# Altium PCB CC3200学习板底板位置图封装图.PcbDoc
Units mil, origin at the board's own origin, x right, y up, seen from the top; angles counter-clockwise.
Board outline 3346.46 x 3346.46 mil, 2 copper layers (Top Layer, Bottom Layer); 92 components, 0 nets, 406 pads, 0 vias.
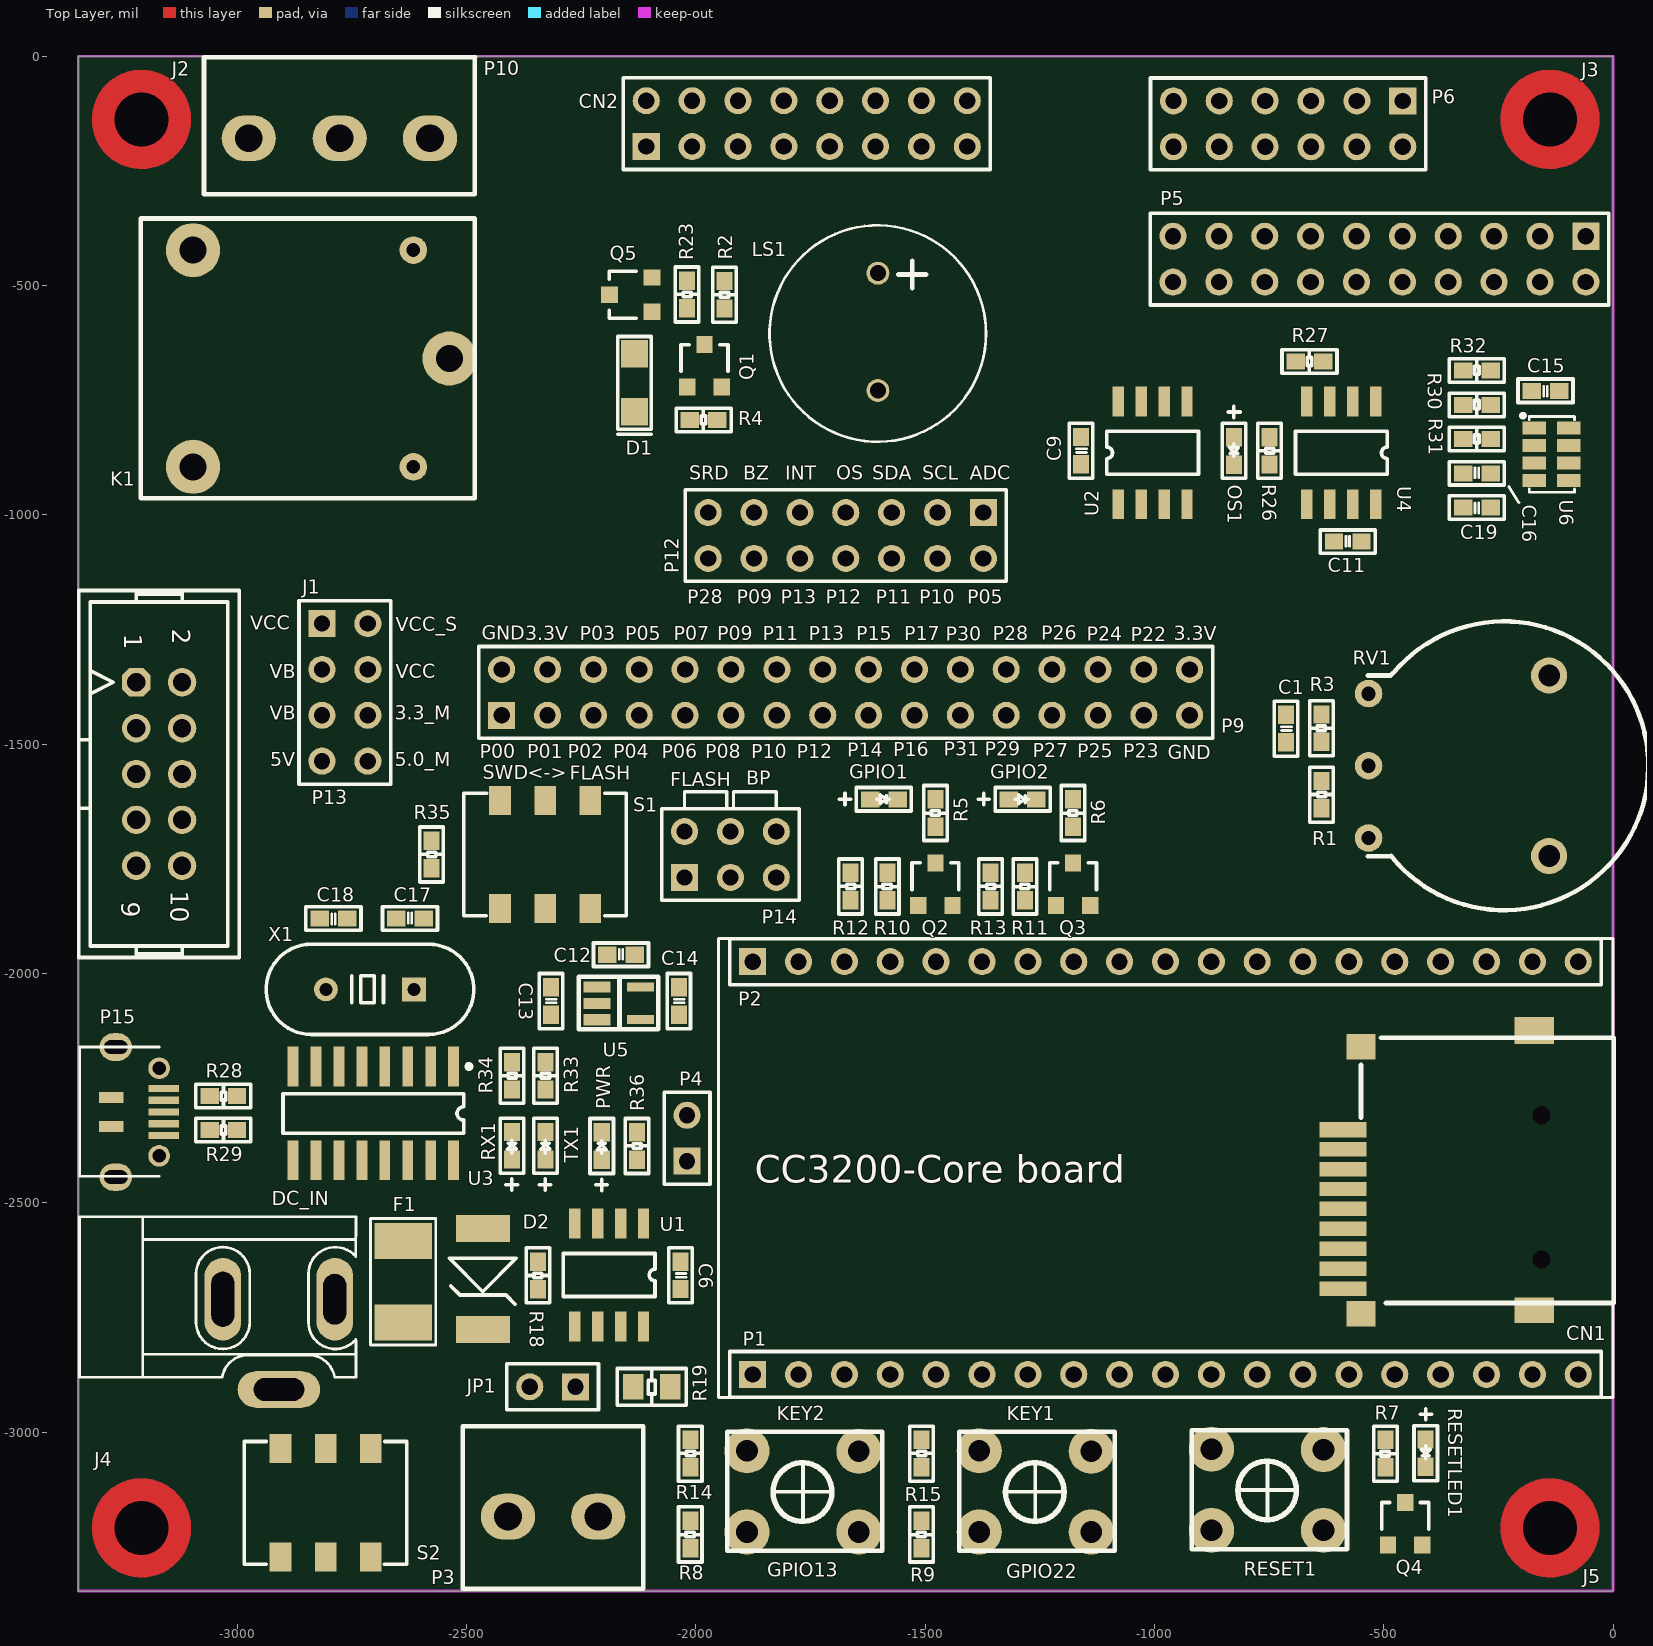
[diagram p0: Top Layer view]
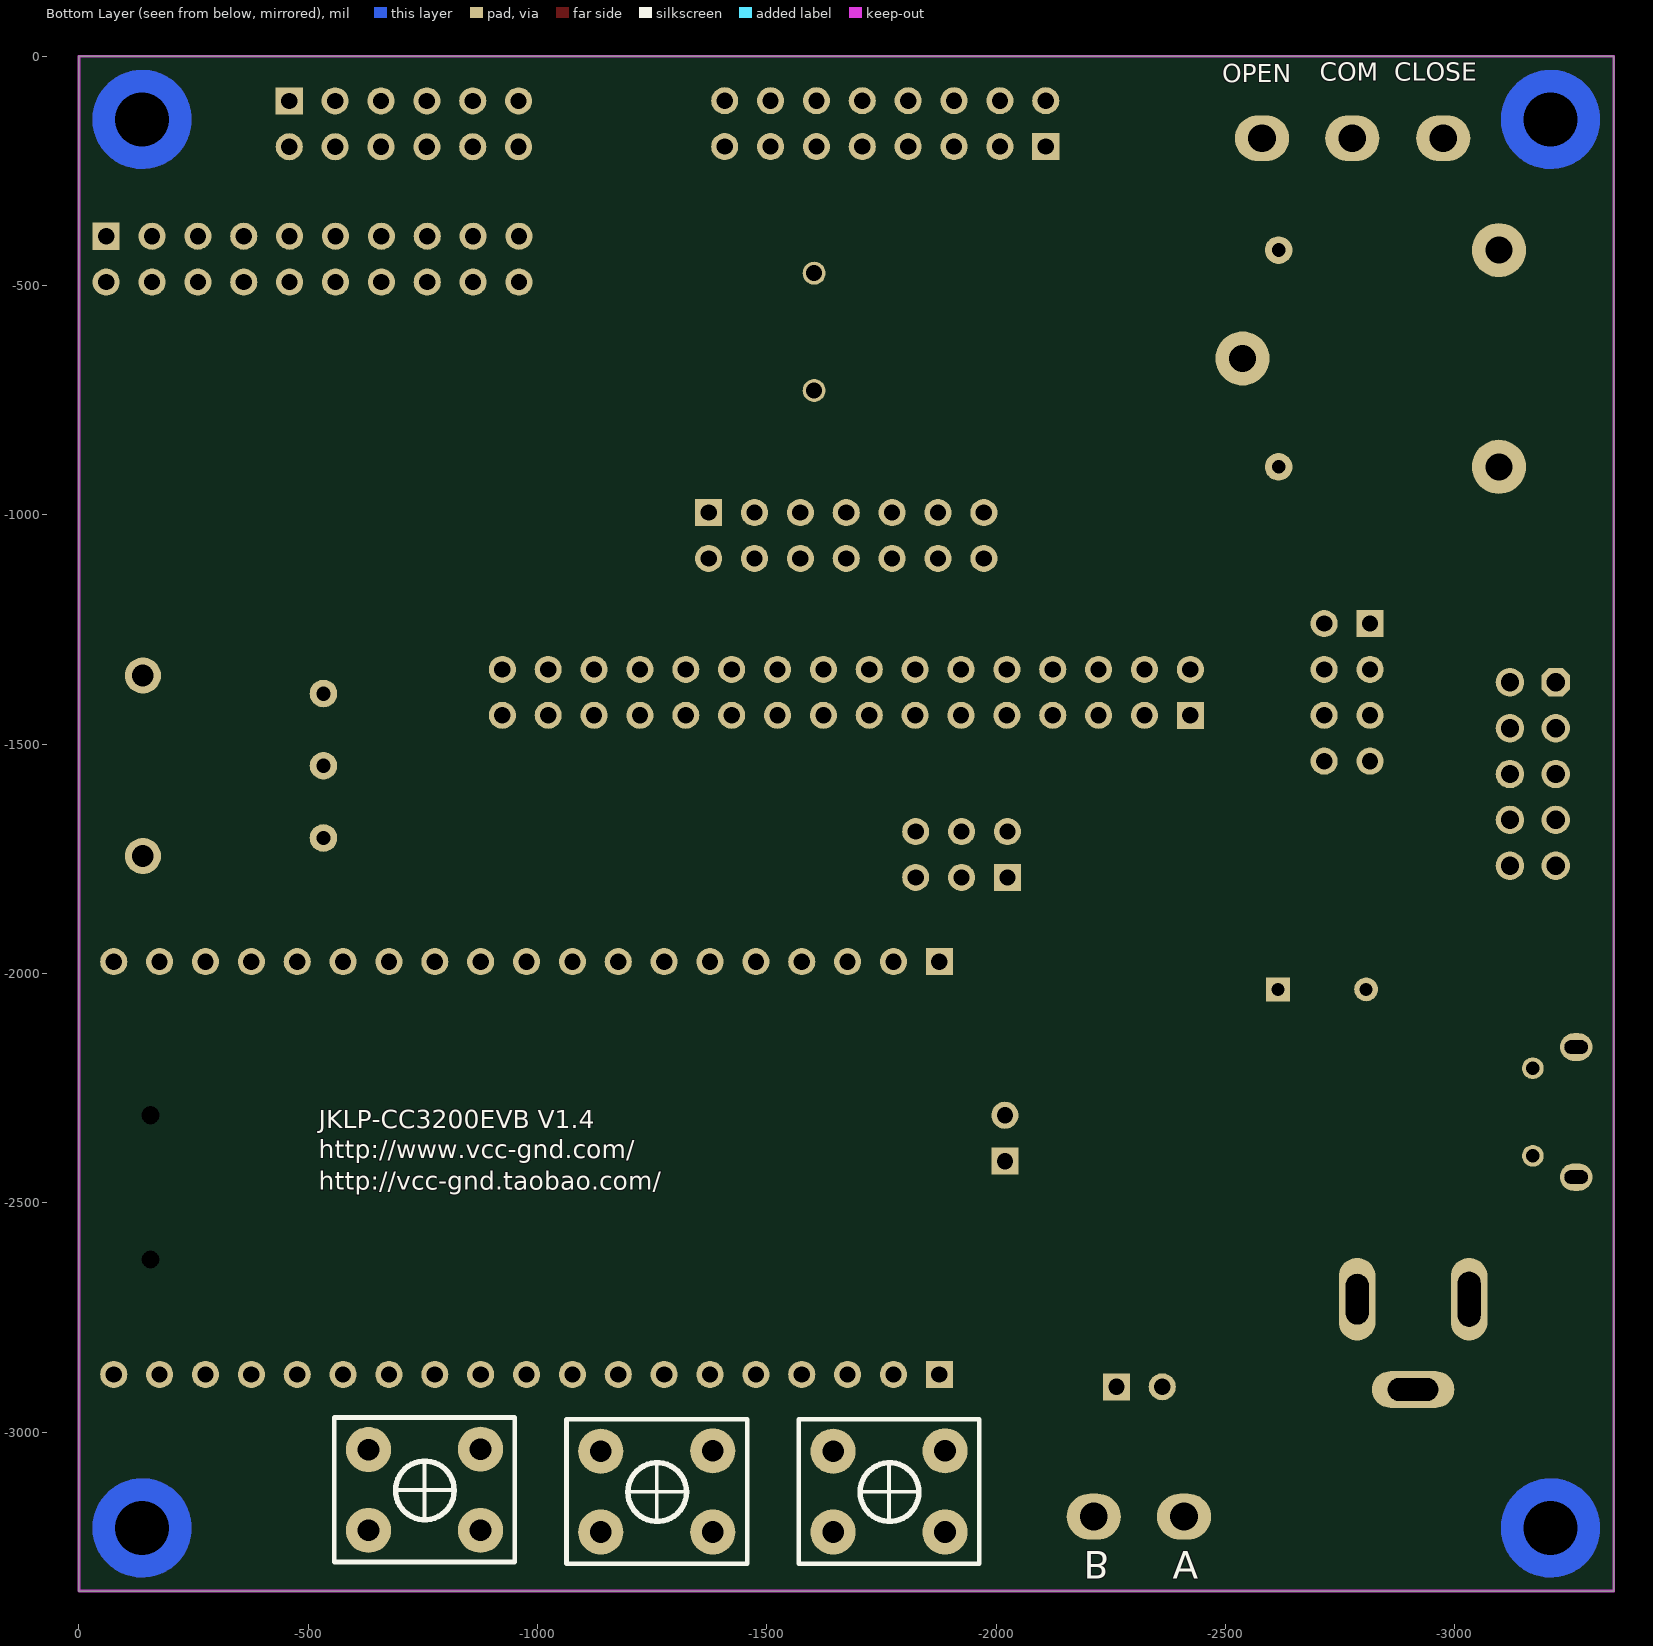
[diagram p1: Bottom Layer view, seen from below]

## Layer stack, top to bottom
Top Solder: solder mask 0.4, Solder Resist, Dk 3.5
Top Layer: signal copper 1.4
Dielectric 1: dielectric 12.6, FR-4, Dk 4.8
Bottom Layer: signal copper 1.4
Bottom Solder: solder mask 0.4, Solder Resist, Dk 3.5

## Board outline
-3050.46,0 0,0 0,-3315.46 0,-3346.46 -32.46,-3346.46 -3346.46,-3346.46 -3346.46,0

## Design rules (kind name [scope] priority, off if disabled: settings)
Clearance [All] p1: gap=7
PolygonConnect [(InPadClass('All Pads'))] p1: connectstyle=Relief reliefconductorwidth=20 reliefentries=4 polygonreliefangle="90 Angle" airgapwidth=10
PolygonConnect PolygonConnect_1 [All] p2: connectstyle=Direct reliefconductorwidth=10 reliefentries=4 polygonreliefangle="90 Angle" airgapwidth=10
RoutingVias [All] p1: holewidth=28 width=50 viastyle="Through Hole" minholewidth=28 minwidth=50 maxholewidth=28 maxwidth=50
SolderMaskExpansion [All] p1: expansion=4
Width [All] p1: maxlimit=200 minlimit=10 preferedwidth=10
29 further rules are at their usual default settings.

## Components (designator, comment, footprint, x,y, rotation, side; value= is the part's Value field where it differs from the comment)
C1 "103,0603" C0603 -713,-1466 r90 top
C6 "104,0603" C0603 -2033,-2658 r90 top
C9 "104,0603" C0603 -1160,-860 r90 top
C11 "104,0603" C0603 -578.53,-1058.46 r180 top
C12 "105,0603" C0603 -2163,-1959 r180 top
C13 "105,0603" C0603 -2316,-2060 r90 top
C14 "103,0603" C0603 -2037,-2060 r90 top
C15 "104,0603" C0603 -147.46,-729.46 r0 top
C16 "104,0603" C0603 -297,-909.36 r180 top
C17 "20p,0603" C0603 -2623,-1880 r180 top
C18 "20p,0603" C0603 -2790,-1880 r0 top
C19 "104,0603" C0603 -297,-984 r0 top
CN1 "PJS008-2000" TF -156,-2429 r180 top
CN2 "Header 8X2" HDR2X8 -2108,-197 r0 top
D1 "1N4148" D1206 -2134,-712 r270 top
D2 "SMBJ5.0A" SMBJ -2464,-2661 r270 top
DC_IN "POWER" DC10B -3206,-2880 r0 top
F1 "Fuse 2" fuse -2638,-2672 r90 top
GPIO1 "LED2" LED0603 -1589.96,-1620.09 r180 top
GPIO2 "LED2" LED0603 -1287.46,-1620.09 r180 top
J1 "Header 5X2" 10P -3170,-1565 r0 top locked
J2 "Socket" KONG -3208.66,-137.8 r0 top
J3 "Socket" KONG -137.8,-137.8 r0 top
J4 "Socket" KONG -3208.66,-3208.66 r0 top
J5 "Socket" KONG -137.8,-3208.66 r0 top
JP1 "2P,2.54mm" HDR1X2 -2262,-2901 r180 top
K1 "SRD-5V" SRD -2537,-659 r180 top
KEY1 "" key -1259.96,-3129.09 r0 top
KEY2 "" key -1766.46,-3129.09 r0 top
LS1 "Speaker" SPEAKER -1603,-601 r270 top
OS1 "LED" LED0603 -826.73,-860.46 r90 top
P1 "Header 19" HDR1X19 -1876,-2874.09 r0 top
P2 "Header 19" HDR1X19 -1876,-1974.09 r0 top
P3 "Header 2" 2P -2311,-3184 r0 top
P4 "Header 2" HDR1X2 -2019,-2409 r90 top
P5 "Header 10X2" HDR2X10 -59.46,-392.46 r180 top
P6 "Header 6X2" HDR2X6 -708.66,-147.46 r180 top
P9 "Header 16X2" HDR2X16 -2423.23,-1437.01 r0 top
P10 "Header 3" "3P - D" -2777,-179 r270 top
P12 "Header 7X2" HDR2X7 -1373,-995 r180 top
P13 "Header 4X2" HDR2X4 -2815,-1237 r270 top
P14 "Header 3X2H" HDR2X3 -2024.46,-1790.46 r0 top
P15 "USB-mrico" MicroUSB-B -3170,-2302 r270 top
PWR "LED2" LED0603 -2205,-2376 r270 top
Q1 "S8050" SOT23 -1981,-675 r0 top
Q2 "BSS138LT3G" SOT23 -1477.46,-1805.09 r0 top
Q3 "BSS138LT3G" SOT23 -1177.46,-1805.09 r0 top
Q4 "BSS138LT3G" SOT23 -453.46,-3199.46 r0 top
Q5 "S8050" SOT23 -2142,-520 r90 top
R1 "15K,0603" R0603 -636,-1610 r90 top
R2 "100,0603" R0603 -1937,-520 r270 top
R3 "1K,0603" R0603 -636,-1465 r270 top
R4 "10k,0603" R0603 -1983,-793 r180 top
R5 "270,0603" R0603 -1477.46,-1650.09 r270 top
R6 "270,0603" R0603 -1177.46,-1650.09 r270 top
R7 "270,0603" R0603 -496.58,-3046.68 r270 top
R8 "1k,0603" R0603 -2011.97,-3223 r270 top
R9 "1k,0603" R0603 -1508,-3223 r270 top
R10 "10k,0603" R0603 -1582.46,-1810.24 r270 top
R11 "10k,0603" R0603 -1282.46,-1810.24 r270 top
R12 "100k,0603" R0603 -1662.46,-1810.09 r90 top
R13 "100k,0603" R0603 -1357.46,-1810.09 r90 top
R14 "10k,0603" R0603 -2011.97,-3046.54 r90 top
R15 "10k,0603" R0603 -1508,-3046.54 r90 top
R18 "10k,0603" R0603 -2344,-2658.07 r270 top
R19 "120R,0603" R0805 -2096,-2901 r0 top
R23 "10k,0603" R0603 -2019.46,-519.46 r90 top
R26 "680R,0603" R0603 -749.46,-860.39 r90 top
R27 "10k,0603" R0603 -662,-666 r180 top
R28 "22,0603" R0603 -3030.08,-2267 r0 top
R29 "22,0603" R0603 -3030.08,-2340.73 r0 top
R30 "3.3k,0603" R0603 -297.07,-760.09 r180 top
R31 "3.3k,0603" R0603 -297.07,-834.73 r180 top
R32 "3.3k,0603" R0603 -297.07,-685.46 r180 top
R33 "680R,0603" R0603 -2328,-2223 r90 top
R34 "680R,0603" R0603 -2401,-2223 r90 top
R35 "270,0603" R0603 -2576,-1740.39 r90 top
R36 "680R,0603" R0603 -2128,-2375.93 r90 top
RESET1 "" key -753.46,-3125.46 r0 top
RESETLED1 "LED2" LED0603 -408.58,-3045.68 r90 top
RV1 "10K,RV09" B503 -238,-1547 r270 top
RX1 "LED" LED0603 -2401,-2375.46 r270 top
S1 "SWITCH" switch1 -2328.46,-1740.46 r0 top
S2 "SWITCH" switch1 -2807,-3154 r180 top
TX1 "LED" LED0603 -2328,-2375.46 r270 top
U1 "SP3485" SOP-8 -2114,-2545 r270 top
U2 "AT24C08" SOP-8 -1079,-977 r90 top
U3 "CH340G" SOP16M -2703,-2305 r180 top
U4 "LM75A" SOP-8 -517.46,-752.59 r270 top
U5 "RT9193" SOT-23-5 -2168,-2065 r270 top
U6 "AP3216C" QFN8 -104.46,-810.46 r270 top
X1 "12MHz,49s" XL -2710.46,-2034.46 r180 top

## Footprints (in the part's own frame and the unit in brackets; to place one, negate y for a bottom-side part, rotate by r counter-clockwise, add the part's x,y. Pads: shape width x height; smd on the part's side, far side on the other; paste and mask are expansions set on the pad)
2P [mm]
  oval 3x2.54 hole 1.54: 1(-2.5,0) 2(2.5,0)
  silkscreen extent -5,-4 5,5
"3P - D" [mm]
  oval 2.54x3 hole 1.54: 1(0,5.017) 2(0,0.017) 3(0,-5.016)
  silkscreen extent -4.5,-7.5 3.1,7.52
10P [mil]
  oct 62x62 hole 40: 1(-50,200)
  round 62 hole 40: 2(50,200) 3(-50,100) 4(50,100) 5(-50,0) 6(50,0) 7(-50,-100) 8(50,-100) 9(-50,-200) 10(50,-200)
  silkscreen extent -175,-400 175,400
B503 [mm]
  round 2 hole 1.2: 0(-5,2.5) 0(5,2.5)
  round 1.524 hole 0.8: 1(-4,-7.5) 2(0,-7.5) 3(4,-7.5)
  silkscreen extent -8,-7.53 8,8
C0603 [mil]
  rect 40x35 smd: 1(-29.92,0) 2(29.92,0)
  silkscreen extent -60,-26 60,26
D1206 [mm]
  rect 1.524x1.5 smd: 1(-1.6,0) 2(1.6,0)
  silkscreen extent -2.57,-0.91 2.84,0.94
DC10B [mil]
  oval 80x180 hole 50 slot 110 at 90 deg: 1(419.09,170)
  oval 80x180 hole 50 slot 120 at 90 deg: 2(175,170)
  oval 180x80 hole 50 slot 110 at 0 deg: 3(297.05,-26.85)
  silkscreen extent -138,0 465,350
fuse [mm]
  rect 2x3.2 smd: 1(-2.25,0) 2(2.25,0)
  silkscreen extent -3.5,-1.8 3.5,1.8
HDR1X2 [mm] "Connector; Header; 2 Position"
  rect 1.5x1.5 hole 0.9: 1(0,0)
  round 1.5 hole 0.9: 2(2.54,0)
  silkscreen extent -1.27,-1.27 3.81,1.27
HDR1X19 [mm] "Connector; Header; 19 Position"
  rect 1.5x1.5 hole 0.9: 1(0,0)
  round 1.5 hole 0.9: 2(2.54,0) 3(5.08,0) 4(7.62,0) 5(10.16,0) 6(12.7,0) 7(15.24,0) 8(17.78,0) 9(20.32,0) 10(22.86,0) 11(25.4,0) 12(27.94,0) 13(30.48,0) 14(33.02,0) 15(35.56,0) 16(38.1,0) 17(40.64,0) 18(43.18,0) 19(45.72,0)
  silkscreen extent -1.27,-1.27 46.99,1.27
HDR2X3 [mm] "Connector; Header; 3x2 Position"
  rect 1.5x1.5 hole 0.9: 1(0,0)
  round 1.5 hole 0.9: 2(0,2.54) 3(2.54,0) 4(2.54,2.54) 5(5.08,0) 6(5.08,2.54)
  silkscreen extent -1.27,-1.27 6.35,3.81
HDR2X4 [mm] "Connector; Header; 4x2 Position"
  rect 1.5x1.5 hole 0.9: 1(0,0)
  round 1.5 hole 0.9: 2(0,2.54) 3(2.54,0) 4(2.54,2.54) 5(5.08,0) 6(5.08,2.54) 7(7.62,0) 8(7.62,2.54)
  silkscreen extent -1.27,-1.27 8.89,3.81
HDR2X6 [mm] "Connector; Header; 6x2 Position"
  rect 1.5x1.5 hole 0.9: 1(-6.35,-1.27)
  round 1.5 hole 0.9: 2(-6.35,1.27) 3(-3.81,-1.27) 4(-3.81,1.27) 5(-1.27,-1.27) 6(-1.27,1.27) 7(1.27,-1.27) 8(1.27,1.27) 9(3.81,-1.27) 10(3.81,1.27) 11(6.35,-1.27) 12(6.35,1.27)
  silkscreen extent -7.62,-2.54 7.62,2.54
HDR2X7 [mm] "Connector; Header; 7x2 Position"
  rect 1.5x1.5 hole 0.9: 1(0,0)
  round 1.5 hole 0.9: 2(0,2.54) 3(2.54,0) 4(2.54,2.54) 5(5.08,0) 6(5.08,2.54) 7(7.62,0) 8(7.62,2.54) 9(10.16,0) 10(10.16,2.54) 11(12.7,0) 12(12.7,2.54) 13(15.24,0) 14(15.24,2.54)
  silkscreen extent -1.27,-1.27 16.51,3.81
HDR2X8 [mm] "Connector; Header; 8x2 Position"
  rect 1.5x1.5 hole 0.9: 1(0,0)
  round 1.5 hole 0.9: 2(0,2.54) 3(2.54,0) 4(2.54,2.54) 5(5.08,0) 6(5.08,2.54) 7(7.62,0) 8(7.62,2.54) 9(10.16,0) 10(10.16,2.54) 11(12.7,0) 12(12.7,2.54) 13(15.24,0) 14(15.24,2.54) 15(17.78,0) 16(17.78,2.54)
  silkscreen extent -1.27,-1.27 19.05,3.81
HDR2X10 [mm] "Connector; Header; 10x2 Position"
  rect 1.5x1.5 hole 0.9: 1(0,0)
  round 1.5 hole 0.9: 2(0,2.54) 3(2.54,0) 4(2.54,2.54) 5(5.08,0) 6(5.08,2.54) 7(7.62,0) 8(7.62,2.54) 9(10.16,0) 10(10.16,2.54) 11(12.7,0) 12(12.7,2.54) 13(15.24,0) 14(15.24,2.54) 15(17.78,0) 16(17.78,2.54) 17(20.32,0) 18(20.32,2.54) 19(22.86,0) 20(22.86,2.54)
  silkscreen extent -1.27,-1.27 24.13,3.81
HDR2X16 [mm] "Connector; Header; 16x2 Position"
  rect 1.5x1.5 hole 0.9: 1(0,0)
  round 1.5 hole 0.9: 2(0,2.54) 3(2.54,0) 4(2.54,2.54) 5(5.08,0) 6(5.08,2.54) 7(7.62,0) 8(7.62,2.54) 9(10.16,0) 10(10.16,2.54) 11(12.7,0) 12(12.7,2.54) 13(15.24,0) 14(15.24,2.54) 15(17.78,0) 16(17.78,2.54) 17(20.32,0) 18(20.32,2.54) 19(22.86,0) 20(22.86,2.54) 21(25.4,0) 22(25.4,2.54) 23(27.94,0) 24(27.94,2.54) 25(30.48,0) 26(30.48,2.54) 27(33.02,0) 28(33.02,2.54) 29(35.56,0) 30(35.56,2.54) 31(38.1,0) 32(38.1,2.54)
  silkscreen extent -1.27,-1.27 39.37,3.81
key [mm]
  round 2.5 hole 1.2: 1(-3.1,-2.248) 1(3.1,-2.248) 2(-3.1,2.248) 2(3.1,2.222)
  silkscreen extent -4.2,-3.3 4.4,3.3
KONG [mm]
  round 0 hole 3 mask+3: 1(0,0)
  Top Layer circle w1.5: c0,0 r2
  Bottom Layer circle w1.5: c0,0 r2
LED0603 [mil]
  rect 40x35 smd: 1(29.92,0) 2(-29.92,0)
  silkscreen extent -60,-26 97,26
MicroUSB-B [mm]
  oval 1.54x1.8 hole 0.762 slot 1.3 at 90 deg: 0(-3.6,-2.4)
  round 1.2 hole 0.762: 0(-2.425,0) 0(2.425,0)
  rect 0.6x1.35 smd: 0(-0.8,-2.65) 0(0.8,-2.65)
  oval 1.524x1.8 hole 0.762 slot 1.3 at 90 deg: 0(3.6,-2.4)
  rect 0.4x1.7 smd: 1(1.3,0.25) 2(0.65,0.25) 3(0,0.25) 4(-0.65,0.25) 5(-1.3,0.25)
  silkscreen extent -3.6,-4.4 3.56,0
QFN8 [mm]
  rect 0.7x1.3 smd: 1(0,-1.703) 2(0.97,-1.703) 3(1.94,-1.703) 4(2.91,-1.703) 5(2.91,0.203) 6(1.94,0.203) 7(0.97,0.203) 8(0,0.203)
  silkscreen extent -0.78,-2.44 3.56,0.51
R0603 [mil]
  rect 40x35 smd: 1(-29.92,0) 2(29.92,0)
  silkscreen extent -60,-26 60,26
R0805 [mil]
  rect 45x55 smd: 1(-40,0) 2(40,0)
  silkscreen extent -75,-40 75,40
SMBJ [mm]
  rect 1.5x3 smd: 1(-2.667,0) 2(2.921,0)
  silkscreen extent -1.02,-1.85 1.52,1.83
SOP16M [mm]
  rect 0.6x2.2 smd: 1(-4.445,-2.6) 2(-3.175,-2.6) 3(-1.905,-2.6) 4(-0.635,-2.6) 5(0.635,-2.6) 6(1.905,-2.6) 7(3.175,-2.6) 8(4.445,-2.6) 9(4.445,2.6) 10(3.175,2.6) 11(1.905,2.6) 12(0.635,2.6) 13(-0.635,2.6) 14(-1.905,2.6) 15(-3.175,2.6) 16(-4.445,2.6)
  silkscreen extent -5.42,-2.72 5,1.1
SOP-8 [mil]
  rect 65x25 smd: 1(0,0) 2(0,-50) 3(0,-100) 4(0,-150) 5(224.41,-150) 6(224.41,-100) 7(224.41,-50) 8(224.41,0)
  silkscreen extent 65,-175 159,25
SOT23 [mm]
  rect 0.9x0.95 smd: 1(0,1.175) 2(-0.95,-1.175) 3(0.95,-1.175)
  silkscreen extent -1.3,-0.3 1.3,1.18
SOT-23-5 [mm]
  rect 0.6x1.5 smd: 1(-0.9,-1.2) 2(0,-1.2)
  rect 0.63x1.5 smd: 3(0.9,-1.2)
  rect 0.5x1.5 smd: 4(0.9,1.2) 5(-0.9,1.2)
  silkscreen extent -1.47,-2.21 1.43,2.18
SPEAKER [mil]
  round 50 hole 35: 1(-127.92,0) 2(127.92,0)
  silkscreen extent -232,-236 240,236
SRD [mm]
  round 3 hole 1.5: 1(0,0) 2(14.2,6) 3(14.2,-6)
  round 1.524 hole 0.762: 4(2,6) 5(2,-6)
  silkscreen extent -1.4,-7.75 17.1,7.75
switch1 [mm]
  rect 1.2x1.6 smd: 1(-2.5,-3) 2(0,-3) 3(2.5,-3) 4(2.5,3) 5(0,3) 6(-2.5,3)
  silkscreen extent -4.5,-3.4 4.5,3.4
TF [mm]
  rect 2.6x0.85 smd: 1(11,-2.25)
  rect 2.6x0.8 smd: 2(11,-1.172) 3(11,-0.069) 4(11,1.034) 5(11,2.137) 6(11,3.241) 7(11,4.344) 8(11,5.447) 9(11,6.55)
  round 0 hole 1: 11(0,-3.05) 12(0,4.95)
  rect 1.6x1.4 smd: G1(10,7.95) G4(10,-6.85)
  rect 2.2x1.5 smd: G2(0.4,-7.75)
  rect 2.2x1.4 smd: G3(0.4,7.75)
  silkscreen extent -4,-7.35 10,7.35
XL [mil]
  rect 52x52 hole 28: 1(-96.06,0)
  round 52 hole 28: 2(96.06,0)
  silkscreen extent -226,-98 226,98

## Part data
C1 C9 C12 C13 C14: library part Cap, "Capacitor"
C6 C11 C15 C16 C17 C18 C19: library part CAP, "Capacitor"
CN1: library part SMS016AFA5E
CN2: "Header, 8-Pin, Dual row"
D1: library part "Diode 1N4148", "High Conductance Fast Diode"
D2: library part SMBJ, "TVS"
DC_IN: library part POW
F1: "Fuse"
GPIO1 GPIO2 PWR RESETLED1: "Typical RED, GREEN, YELLOW, AMBER GaAs LED"
J1: "Header, 5-Pin, Dual row"
JP1: library part JP2
K1: library part Relay-SPDT, "Single-Pole Dual-Throw Relay"
KEY1 KEY2 RESET1: library part SW-PB_V, "SWITCH"
LS1: "Loudspeaker"
P1 P2: "Header, 19-Pin"
P3 P4: "Header, 2-Pin"
P5: "Header, 10-Pin, Dual row"
P6: "Header, 6-Pin, Dual row"
P9: "Header, 16-Pin, Dual row"
P10: "Header, 3-Pin"
P12: "Header, 7-Pin, Dual row"
P13: "Header, 4-Pin, Dual row"
P14: "Header, 3-Pin, Dual row, Right Angle"
P15: library part usb-STM
Q1 Q5: library part NPN, "NPN Bipolar Transistor"
Q2 Q3 Q4: library part MOS
R1 R2 R3 R4 R5 R6 R7 R8 R9 R10 R11 R12 R13 R14 R15 R18 R19 R23 R26 R27 R28 R29 R30 R31 R32 R33 R34 R35 R36: library part Res1, "Resistor"
RV1: library part RV
S1 S2: library part switch1
U1: library part SP3458
U2: library part ST24C08RB5, "Serial 8K (1K x 8) EEPROM"
U3: "USB to TTL Serial / UART"
U5: library part RT9193X_5P
U6: "ALS+PS Sensor"
X1: library part CRYSTAL, "Crystal"

## Nets (pads, with @x,y where several pads share a name; then routed paths per layer and width w, separated by ;. In a path a pad name is that pad's centre, name@x,y a point inside that pad or via, vN(x,y) a via of type N, cw(c..) or ccw(c..) an arc to the next point about the centre after c; other vN are vias at no path point)
pads on no net: C1.1 C1.2 C6.1 C6.2 C9.1 C9.2 C11.1 C11.2 C12.1 C12.2 C13.1 C13.2 C14.1 C14.2 C15.1 C15.2 C16.1 C16.2 C17.1 C17.2 C18.1 C18.2 C19.1 C19.2 CN1.1 CN1.2 CN1.3 CN1.4 CN1.5 CN1.6 CN1.7 CN1.8 CN1.9 CN1.11 CN1.12 CN1.G1 CN1.G2 CN1.G3 CN1.G4 CN2.1 CN2.2 CN2.3 CN2.4 CN2.5 CN2.6 CN2.7 CN2.8 CN2.9 CN2.10 CN2.11 CN2.12 CN2.13 CN2.14 CN2.15 CN2.16 D1.1 D1.2 D2.1 D2.2 DC_IN.1 DC_IN.2 DC_IN.3 F1.1 F1.2 GPIO1.1 GPIO1.2 GPIO2.1 GPIO2.2 J1.1 J1.2 J1.3 J1.4 J1.5 J1.6 J1.7 J1.8 J1.9 J1.10 J2.1 J3.1 J4.1 J5.1 JP1.1 JP1.2 K1.1 K1.2 K1.3 K1.4 K1.5 KEY1.1 KEY1.2 KEY2.1 KEY2.2 LS1.1 LS1.2 OS1.1 OS1.2 P1.1 P1.2 P1.3 P1.4 P1.5 P1.6 P1.7 P1.8 P1.9 P1.10 P1.11 P1.12 P1.13 P1.14 P1.15 P1.16 P1.17 P1.18 P1.19 P2.1 P2.2 P2.3 P2.4 P2.5 P2.6 P2.7 P2.8 P2.9 P2.10 P2.11 P2.12 P2.13 P2.14 P2.15 P2.16 P2.17 P2.18 P2.19 P3.1 P3.2 P4.1 P4.2 P5.1 P5.2 P5.3 P5.4 P5.5 P5.6 P5.7 P5.8 P5.9 P5.10 P5.11 P5.12 P5.13 P5.14 P5.15 P5.16 P5.17 P5.18 P5.19 P5.20 P6.1 P6.2 P6.3 P6.4 P6.5 P6.6 P6.7 P6.8 P6.9 P6.10 P6.11 P6.12 P9.1 P9.2 P9.3 P9.4 P9.5 P9.6 P9.7 P9.8 P9.9 P9.10 P9.11 P9.12 P9.13 P9.14 P9.15 P9.16 P9.17 P9.18 P9.19 P9.20 P9.21 P9.22 P9.23 P9.24 P9.25 P9.26 P9.27 P9.28 P9.29 P9.30 P9.31 P9.32 P10.1 P10.2 P10.3 P12.1 P12.2 P12.3 P12.4 P12.5 P12.6 P12.7 P12.8 P12.9 P12.10 P12.11 P12.12 P12.13 P12.14 P13.1 P13.2 P13.3 P13.4 P13.5 P13.6 P13.7 P13.8 P14.1 P14.2 P14.3 P14.4 P14.5 P14.6 P15.0 P15.1 P15.2 P15.3 P15.4 P15.5 PWR.1 PWR.2 Q1.1 Q1.2 Q1.3 Q2.1 Q2.2 Q2.3 Q3.1 Q3.2 Q3.3 Q4.1 Q4.2 Q4.3 Q5.1 Q5.2 Q5.3 R1.1 R1.2 R2.1 R2.2 R3.1 R3.2 R4.1 R4.2 R5.1 R5.2 R6.1 R6.2 R7.1 R7.2 R8.1 R8.2 R9.1 R9.2 R10.1 R10.2 R11.1 R11.2 R12.1 R12.2 R13.1 R13.2 R14.1 R14.2 R15.1 R15.2 R18.1 R18.2 R19.1 R19.2 R23.1 R23.2 R26.1 R26.2 R27.1 R27.2 R28.1 R28.2 R29.1 R29.2 R30.1 R30.2 R31.1 R31.2 R32.1 R32.2 R33.1 R33.2 R34.1 R34.2 R35.1 R35.2 R36.1 R36.2 RESET1.1 RESET1.2 RESETLED1.1 RESETLED1.2 RV1.0 RV1.1 RV1.2 RV1.3 RX1.1 RX1.2 S1.1 S1.2 S1.3 S1.4 S1.5 S1.6 S2.1 S2.2 S2.3 S2.4 S2.5 S2.6 TX1.1 TX1.2 U1.1 U1.2 U1.3 U1.4 U1.5 U1.6 U1.7 U1.8 U2.1 U2.2 U2.3 U2.4 U2.5 U2.6 U2.7 U2.8 U3.1 U3.2 U3.3 U3.4 U3.5 U3.6 U3.7 U3.8 U3.9 U3.10 U3.11 U3.12 U3.13 U3.14 U3.15 U3.16 U4.1 U4.2 U4.3 U4.4 U4.5 U4.6 U4.7 U4.8 U5.1 U5.2 U5.3 U5.4 U5.5 U6.1 U6.2 U6.3 U6.4 U6.5 U6.6 U6.7 U6.8 X1.1 X1.2

## Keep-outs
Keep-Out Layer:
  lines w6: -0.46,0 -3346.46,0 -3346.46,-3346.46 0,-3346.46 0,-1261.46
  lines w6.5: 0,-1314.46 0,-0.46

## Silkscreen, mask and mechanical layers (free items; w line width, h text height)
Top Overlay:
  lines w6.5: -227.46,-938.46 -205.46,-973.46 ; -1950,-2924.09 -1950,-1924.09 0,-1924.09 0,-2924.09 -1950,-2924.09
  lines w7: -2024.46,-1640.46 -2024.46,-1603.46 -1932.46,-1603.46 -1932.46,-1638.46 ; -1917.46,-1640.46 -1917.46,-1604.46 ; -1917.46,-1603.46 -1824.46,-1603.46 ; -1824.46,-1639.46 -1824.46,-1604.46
  text "SRD" at -2014.46,-923.46 h30
  text "BZ" at -1896,-923.46 h30
  text "INT" at -1805,-923.46 h30
  text "OS" at -1694,-923 h30
  text "SDA" at -1615,-923.46 h30
  text "SCL" at -1506,-923.46 h30
  text "ADC" at -1403,-923.46 h30
  text "P28" at -2018.46,-1194 h30
  text "P09" at -1911,-1194 h30
  text "P13" at -1814.46,-1194 h30
  text "P12" at -1717,-1194 h30
  text "P11" at -1608,-1194 h30
  text "P10" at -1513,-1194 h30
  text "P05" at -1408,-1194 h30
  text "VCC" at -2971.88,-1250 h30
  text "VCC_S" at -2654.46,-1254 h30
  text "GND" at -2466.46,-1272.46 h30
  text "P26" at -1246.46,-1272.46 h30
  text "3.3V" at -2371.46,-1273.46 h30
  text "P03" at -2253.46,-1273.1 h30
  text "P05" at -2153.46,-1273.1 h30
  text "P07" at -2048.46,-1273.1 h30
  text "P09" at -1953.46,-1273.1 h30
  text "P11" at -1853.46,-1273.1 h30
  text "P13" at -1753.46,-1273.1 h30
  text "P15" at -1650.46,-1273.46 h30
  text "P17" at -1545.46,-1273.46 h30
  text "P28" at -1352.46,-1273.46 h30
  text "3.3V" at -958.46,-1273.1 h30
  text "P30" at -1455.46,-1274.46 h30
  text "P24" at -1147.46,-1274.46 h30
  text "P22" at -1051.46,-1275.46 h30
  text "VB" at -2929,-1356 h30
  text "VCC" at -2654.46,-1356 h30
  text "VB" at -2929,-1447 h30
  text "3.3_M" at -2656.46,-1447 h30
  text "P31" at -1459.46,-1525.46 h30
  text "P29" at -1370.46,-1525.46 h30
  text "P16" at -1569.46,-1526.46 h30
  text "P14" at -1669.46,-1527.46 h30
  text "P27" at -1265.46,-1528.46 h30
  text "P25" at -1168.46,-1529.46 h30
  text "P23" at -1068.46,-1529.46 h30
  text "P00" at -2470.46,-1530.46 h30
  text "P01" at -2367.46,-1530.46 h30
  text "P02" at -2279.46,-1531.09 h30
  text "P04" at -2179.46,-1531.09 h30
  text "P06" at -2074.46,-1531.09 h30
  text "P08" at -1979.46,-1531.09 h30
  text "P10" at -1879.46,-1531.09 h30
  text "P12" at -1779.46,-1531.09 h30
  text "GND" at -970.46,-1532.46 h30
  text "5V" at -2928,-1548 h30
  text "5.0_M" at -2656,-1548 h30
  text "SWD" at -2465,-1576 h30
  text "<->" at -2366,-1576 h30
  text "FLASH" at -2275,-1577 h30
  text "BP" at -1889.46,-1588.46 h30
  text "FLASH" at -2055.46,-1591.46 h30
  text "CC3200-Core board" at -1871,-2456 h60
  text "GPIO13" at -1844.46,-3315.46 h30
  text "GPIO22" at -1323.46,-3318.46 h30
Bottom Overlay:
  text "CLOSE" at -2868,-54 h40
  text "COM" at -2705,-54 h40
  text "OPEN" at -2493,-57 h40
  text "JKLP-CC3200EVB V1.4" at -522.46,-2337.46 h40
  text "http://www.vcc-gnd.com/" at -522.46,-2402.46 h40
  text "http://vcc-gnd.taobao.com/" at -522.46,-2471.46 h40
  text "B" at -2191,-3260 h60 r180
  text "A" at -2385,-3320 h60

## Dimensions
-3346.46,-3346.46 to -3346.46,0 on Top Overlay
-3208.66,-137.8 to -3208.66,-3208.66 on Top Overlay
-3346.46,-3346.46 to 0,-3346.46 on Top Overlay
-3208.66,-3208.66 to -137.8,-3208.66 on Top Overlay

## Text inside footprints (layer, text, board x,y; h text height)
J1: Top Overlay "10" at -3145,-1820 h40 r270; Top Overlay "9" at -3251,-1844 h40 r270; Top Overlay "2" at -3141,-1248 h40 r270; Top Overlay "1" at -3246,-1259 h40 r270